# Altium PCB RF315Mhz.PcbDoc (part 4 of 5)
Units mil, origin at the board's own origin, x right, y up, seen from the top; angles counter-clockwise.
Board outline 4094.49 x 3779.53 mil, 2 copper layers (Top Layer, Bottom Layer); 180 components, 20 nets, 660 pads, 48 vias.
Unrouted connection lines stored in the file: 100.
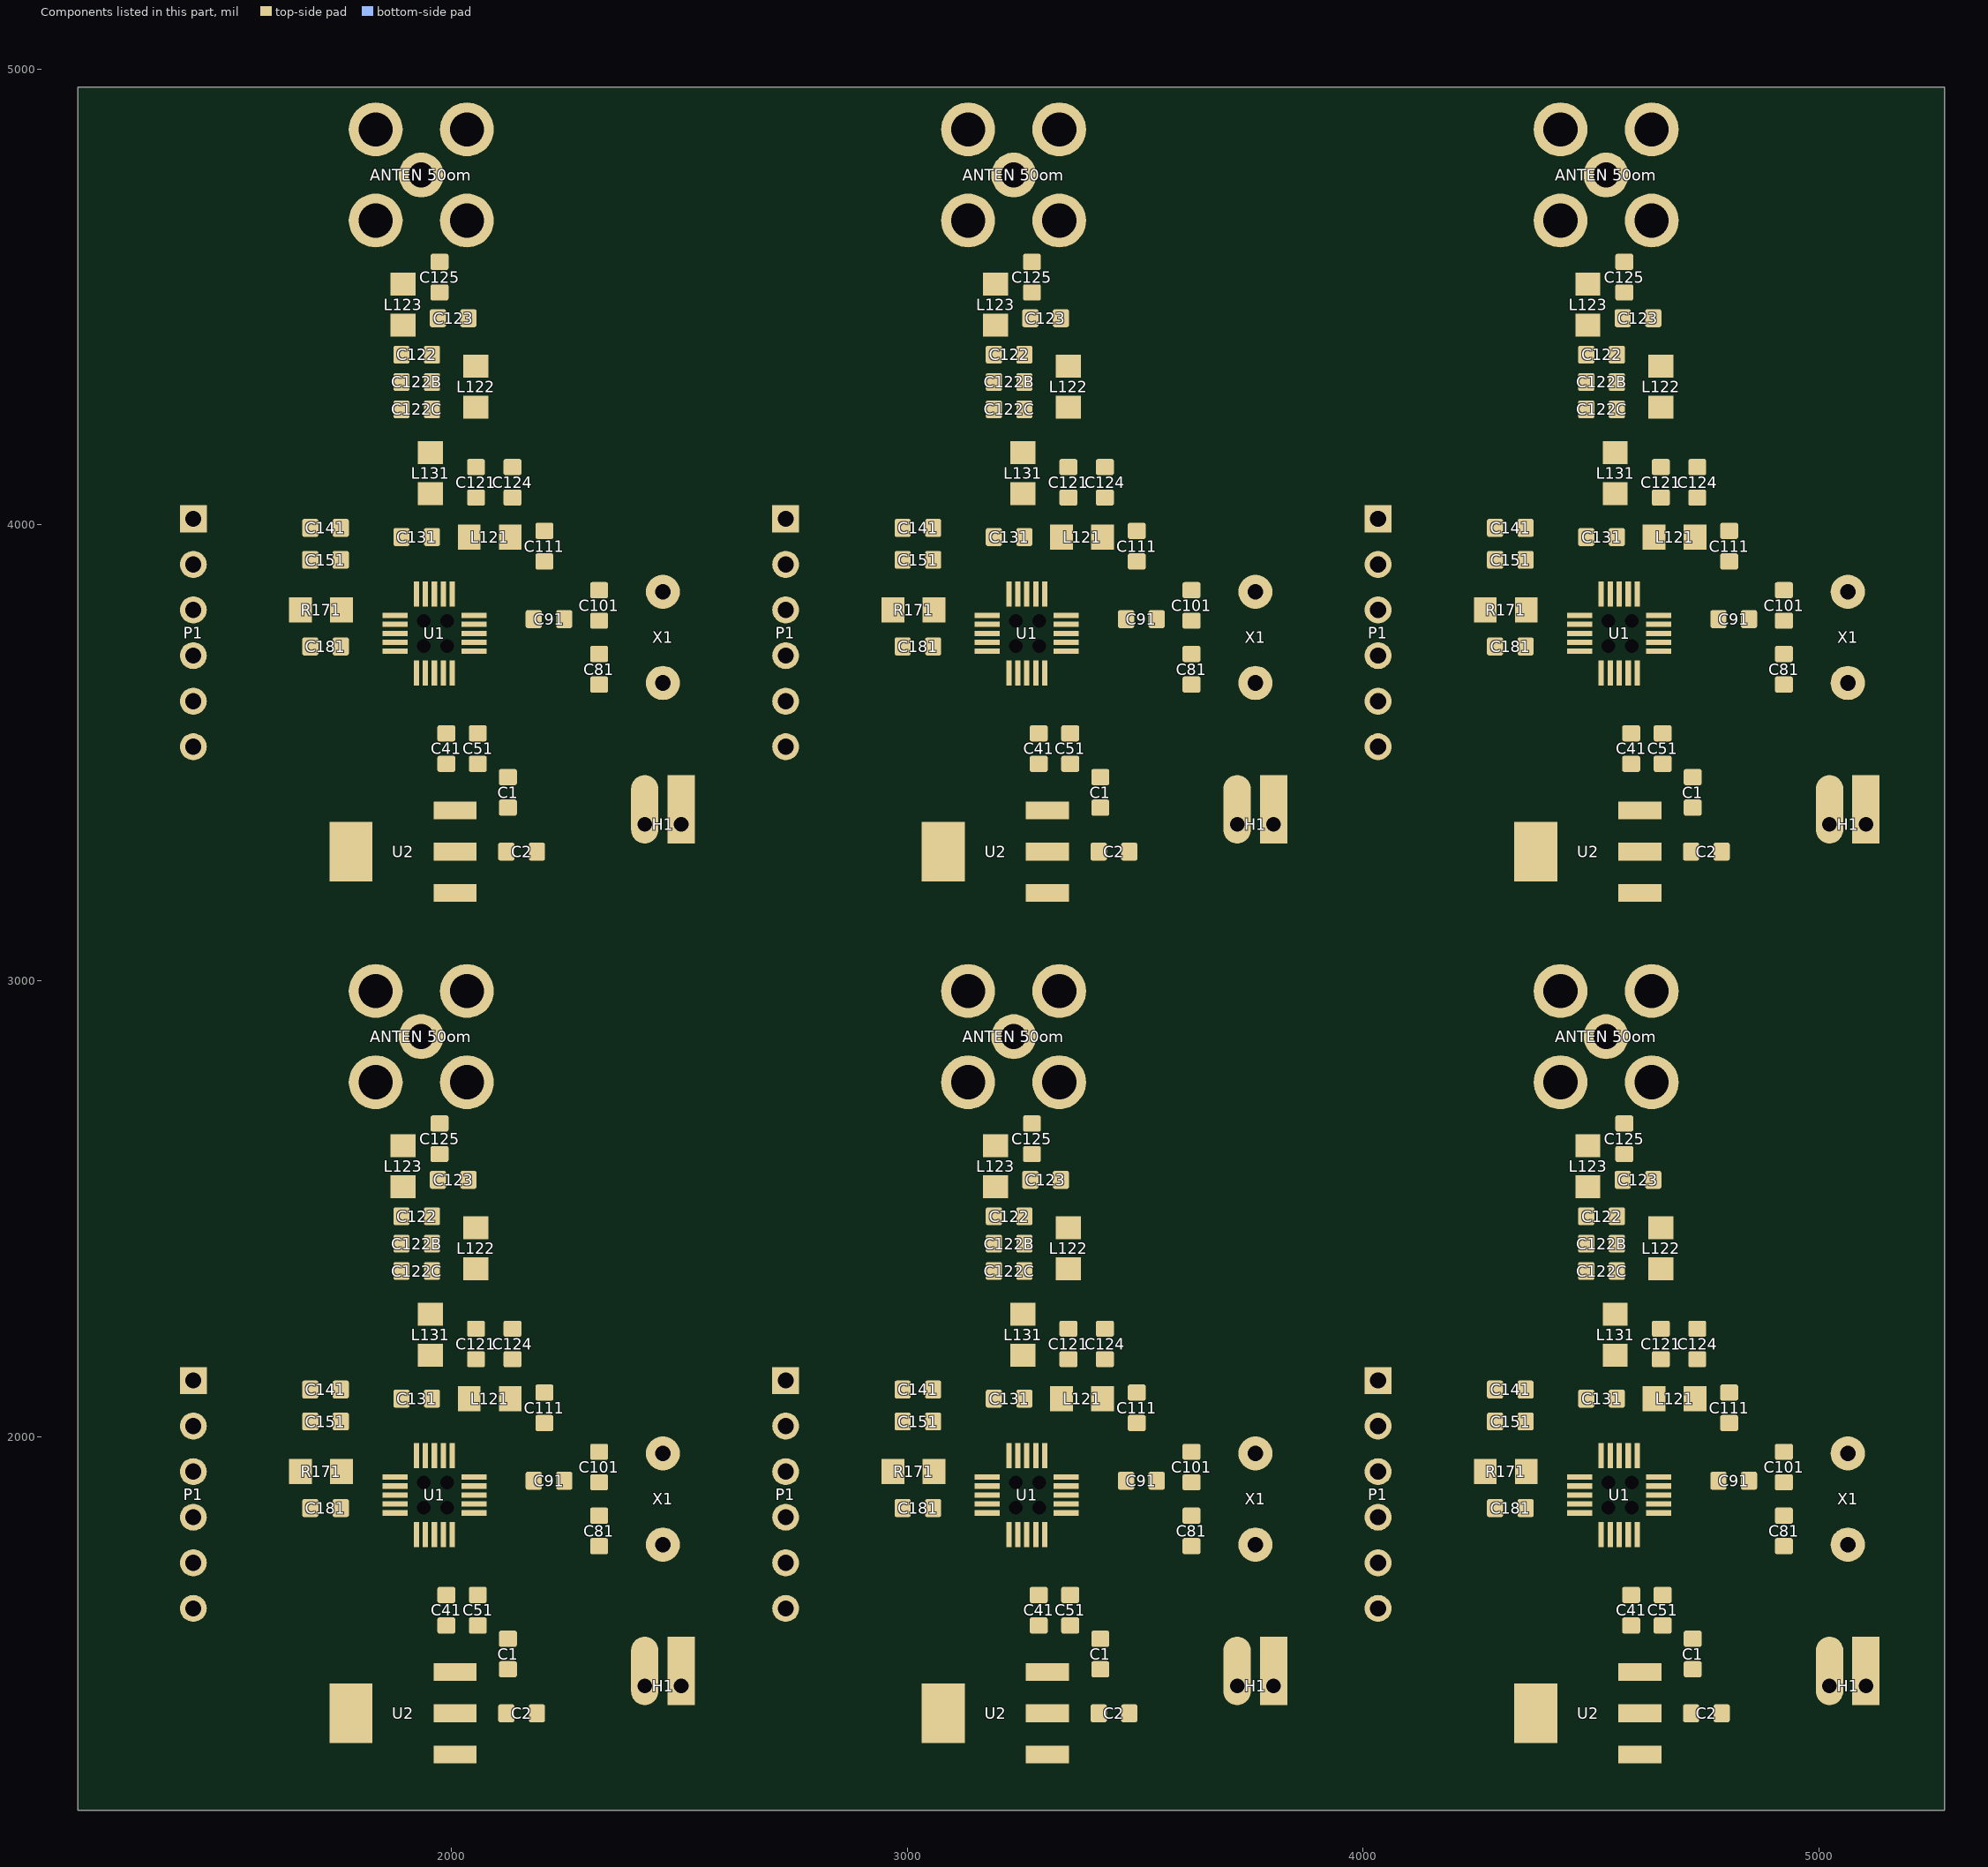
[diagram p4: the components of this part, seen from the top]

## Via types
v1: diameter 50, hole 28, Top Layer to Bottom Layer, 48 vias

## Nets (pads, with @x,y where several pads share a name; then routed paths per layer and width w, separated by ;. In a path a pad name is that pad's centre, name@x,y a point inside that pad or via, vN(x,y) a via of type N, cw(c..) or ccw(c..) an arc to the next point about the centre after c; other vN are vias at no path point) (continued)
copper on no net: (continued)
  Top Layer w1: 3815.78,2886.78 3818.78,2886.78 ; 3815.78,2887.78 3818.78,2887.78 ; 3815.78,2888.78 3818.78,2888.78 ; 3815.78,2889.78 3818.78,2889.78 ; 3815.78,2890.78 3818.78,2890.78 ; 3815.78,2891.78 3818.78,2891.78 ; 3815.78,2892.78 3818.78,2892.78 ; 3815.78,2893.78 3818.78,2893.78 ; 3815.78,2894.78 3818.78,2894.78 ; 3815.78,2895.78 3818.78,2895.78 ; 3815.78,2896.78 3818.78,2896.78 ; 3815.78,2897.78 3818.78,2897.78 ; 3815.78,2898.78 3818.78,2898.78 ; 3815.78,2899.78 3818.78,2899.78 ; 3815.78,2900.78 3818.78,2900.78 ; 3815.78,2901.78 3818.78,2901.78 ; 3815.78,2902.78 3818.78,2902.78 ; 3815.78,2903.78 3818.78,2903.78 ; 3815.78,2904.78 3818.78,2904.78 ; 3815.78,2905.78 3818.78,2905.78 ; 3815.78,2906.78 3818.78,2906.78 ; 3815.78,2907.78 3818.78,2907.78 ; 3815.78,2908.78 3818.78,2908.78 ; 3815.78,2909.78 3818.78,2909.78 ; 3815.78,2910.78 3818.78,2910.78 ; 3815.78,2911.78 3818.78,2911.78 ; 3815.78,2912.78 3818.78,2912.78 ; 3815.78,2913.78 3818.78,2913.78 ; 3815.78,2914.78 3818.78,2914.78 ; 3815.78,2915.78 3818.78,2915.78 ; 3815.78,2916.78 3818.78,2916.78 ; 3815.78,2917.78 3818.78,2917.78 ; 3815.78,2918.78 3818.78,2918.78 ; 3815.78,2919.78 3818.78,2919.78 ; 3815.78,2920.78 3818.78,2920.78 ; 3815.78,2921.78 3818.78,2921.78 ; 3815.78,2922.78 3818.78,2922.78 ; 3815.78,2923.78 3818.78,2923.78 ; 3815.78,2924.78 3818.78,2924.78 ; 3815.78,2925.78 3818.78,2925.78 ; 3815.78,2926.78 3818.78,2926.78 ; 3815.78,2927.78 3818.78,2927.78 ; 3815.78,2928.78 3818.78,2928.78 ; 3815.78,2929.78 3818.78,2929.78 ; 3815.78,2930.78 3818.78,2930.78 ; 3815.78,2931.78 3818.78,2931.78 ; 3815.78,2932.78 3818.78,2932.78 ; 3815.78,2933.78 3818.78,2933.78 ; 3815.78,2934.78 3818.78,2934.78 ; 3815.78,2935.78 3818.78,2935.78 ; 3815.78,2936.78 3818.78,2936.78 ; 3815.78,2937.78 3818.78,2937.78 ; 3815.78,2938.78 3818.78,2938.78 ; 3815.78,2939.78 3818.78,2939.78 ; 3815.78,2940.78 3818.78,2940.78 ; 3815.78,2941.78 3818.78,2941.78 ; 3815.78,2942.78 3818.78,2942.78 ; 3815.78,2943.78 3818.78,2943.78 ; 3815.78,2944.78 3818.78,2944.78 ; 3815.78,2945.78 3818.78,2945.78 ; 3815.78,2946.78 3818.78,2946.78 ; 3815.78,2947.78 3818.78,2947.78 ; 3815.78,2948.78 3818.78,2948.78 ; 3815.78,2949.78 3818.78,2949.78 ; 3815.78,2950.78 3818.78,2950.78 ; 3815.78,2951.78 3818.78,2951.78 ; 3815.78,4698.54 3818.78,4698.54 ; 3815.78,4699.54 3818.78,4699.54 ; 3815.78,4700.54 3818.78,4700.54 ; 3815.78,4701.54 3818.78,4701.54 ; 3815.78,4702.54 3818.78,4702.54 ; 3815.78,4703.54 3818.78,4703.54 ; 3815.78,4704.54 3818.78,4704.54 ; 3815.78,4705.54 3818.78,4705.54 ; 3815.78,4706.54 3818.78,4706.54 ; 3815.78,4707.54 3818.78,4707.54 ; 3815.78,4708.54 3818.78,4708.54 ; 3815.78,4709.54 3818.78,4709.54 ; 3815.78,4710.54 3818.78,4710.54 ; 3815.78,4711.54 3818.78,4711.54 ; 3815.78,4712.54 3818.78,4712.54 ; 3815.78,4713.54 3818.78,4713.54 ; 3815.78,4714.54 3818.78,4714.54 ; 3815.78,4715.54 3818.78,4715.54 ; 3815.78,4716.54 3818.78,4716.54 ; 3815.78,4717.54 3818.78,4717.54 ; 3815.78,4718.54 3818.78,4718.54 ; 3815.78,4719.54 3818.78,4719.54 ; 3815.78,4720.54 3818.78,4720.54 ; 3815.78,4721.54 3818.78,4721.54 ; 3815.78,4722.54 3818.78,4722.54 ; 3815.78,4723.54 3818.78,4723.54 ; 3815.78,4724.54 3818.78,4724.54 ; 3815.78,4725.54 3818.78,4725.54 ; 3815.78,4726.54 3818.78,4726.54 ; 3815.78,4727.54 3818.78,4727.54 ; 3815.78,4728.54 3818.78,4728.54 ; 3815.78,4729.54 3818.78,4729.54 ; 3815.78,4730.54 3818.78,4730.54 ; 3815.78,4731.54 3818.78,4731.54 ; 3815.78,4732.54 3818.78,4732.54 ; 3815.78,4733.54 3818.78,4733.54 ; 3815.78,4734.54 3818.78,4734.54 ; 3815.78,4735.54 3818.78,4735.54 ; 3815.78,4736.54 3818.78,4736.54 ; 3815.78,4737.54 3818.78,4737.54 ; 3815.78,4738.54 3818.78,4738.54 ; 3815.78,4739.54 3818.78,4739.54 ; 3815.78,4740.54 3818.78,4740.54 ; 3815.78,4741.54 3818.78,4741.54 ; 3815.78,4742.54 3818.78,4742.54 ; 3815.78,4743.54 3818.78,4743.54 ; 3815.78,4744.54 3818.78,4744.54 ; 3815.78,4745.54 3818.78,4745.54 ; 3815.78,4746.54 3818.78,4746.54 ; 3815.78,4747.54 3818.78,4747.54 ; 3815.78,4748.54 3818.78,4748.54 ; 3815.78,4749.54 3818.78,4749.54 ; 3815.78,4750.54 3818.78,4750.54 ; 3815.78,4751.54 3818.78,4751.54 ; 3815.78,4752.54 3818.78,4752.54 ; 3815.78,4753.54 3818.78,4753.54 ; 3815.78,4754.54 3818.78,4754.54 ; 3815.78,4755.54 3818.78,4755.54 ; 3815.78,4756.54 3818.78,4756.54 ; 3815.78,4757.54 3818.78,4757.54 ; 3815.78,4758.54 3818.78,4758.54 ; 3815.78,4759.54 3818.78,4759.54 ; 3815.78,4760.54 3818.78,4760.54 ; 3815.78,4761.54 3818.78,4761.54 ; 3815.78,4762.54 3818.78,4762.54 ; 3815.78,4763.54 3818.78,4763.54 ; 3815.78,4764.54 3818.78,4764.54 ; 3815.78,4765.54 3818.78,4765.54 ; 3815.78,4766.54 3818.78,4766.54 ; 3815.78,4767.54 3818.78,4767.54 ; 3815.78,4768.54 3818.78,4768.54 ; 3815.78,4769.54 3818.78,4769.54 ; 3815.78,4770.54 3818.78,4770.54 ; 3815.78,4771.54 3818.78,4771.54 ; 3815.78,4772.54 3818.78,4772.54 ; 3815.78,4773.54 3818.78,4773.54 ; 3815.78,4774.54 3818.78,4774.54 ; 3815.78,4775.54 3818.78,4775.54 ; 3815.78,4776.54 3818.78,4776.54 ; 3815.78,4777.54 3818.78,4777.54 ; 3815.78,4778.54 3818.78,4778.54 ; 3815.78,4779.54 3818.78,4779.54 ; 3815.78,4780.54 3818.78,4780.54 ; 3815.78,4781.54 3818.78,4781.54 ; 3815.78,4782.54 3818.78,4782.54 ; 3815.78,4783.54 3818.78,4783.54 ; 3815.78,4784.54 3818.78,4784.54 ; 3815.78,4785.54 3818.78,4785.54 ; 3815.78,4786.54 3818.78,4786.54 ; 3815.78,4787.54 3818.78,4787.54 ; 3815.78,4788.54 3818.78,4788.54 ; 3815.78,4789.54 3818.78,4789.54 ; 3815.78,4790.54 3818.78,4790.54 ; 3815.78,4791.54 3818.78,4791.54 ; 3815.78,4792.54 3818.78,4792.54 ; 3815.78,4793.54 3818.78,4793.54 ; 3815.78,4794.54 3818.78,4794.54 ; 3815.78,4795.54 3818.78,4795.54 ; 3815.78,4796.54 3818.78,4796.54 ; 3815.78,4797.54 3818.78,4797.54 ; 3815.78,4798.54 3818.78,4798.54 ; 3815.78,4799.54 3818.78,4799.54 ; 3815.78,4800.54 3818.78,4800.54 ; 3815.78,4801.54 3818.78,4801.54 ; 3815.78,4802.54 3818.78,4802.54 ; 3815.78,4803.54 3818.78,4803.54 ; 3815.78,4804.54 3818.78,4804.54 ; 3815.78,4805.54 3818.78,4805.54 ; 3815.78,4806.54 3818.78,4806.54 ; 3815.78,4807.54 3818.78,4807.54 ; 3815.78,4808.54 3818.78,4808.54 ; 3815.78,4809.54 3818.78,4809.54 ; 3815.78,4810.54 3818.78,4810.54 ; 3815.78,4811.54 3818.78,4811.54 ; 3815.78,4812.54 3818.78,4812.54 ; 3815.78,4813.54 3818.78,4813.54 ; 3815.78,4814.54 3818.78,4814.54 ; 3815.78,4815.54 3818.78,4815.54 ; 3815.78,4816.54 3818.78,4816.54 ; 3815.78,4817.54 3818.78,4817.54 ; 3815.78,4818.54 3818.78,4818.54 ; 3815.78,4819.54 3818.78,4819.54 ; 3815.78,4820.54 3818.78,4820.54 ; 3815.78,4821.54 3818.78,4821.54 ; 3815.78,4822.54 3818.78,4822.54 ; 3815.78,4823.54 3818.78,4823.54 ; 3815.78,4824.54 3818.78,4824.54 ; 3815.78,4825.54 3818.78,4825.54 ; 3815.78,4826.54 3818.78,4826.54 ; 3815.78,4827.54 3818.78,4827.54 ; 3815.78,4828.54 3818.78,4828.54 ; 3815.78,4829.54 3818.78,4829.54 ; 3815.78,4830.54 3818.78,4830.54 ; 3815.78,4831.54 3818.78,4831.54 ; 3815.78,4832.54 3818.78,4832.54 ; 3815.78,4833.54 3818.78,4833.54 ; 3815.78,4834.54 3818.78,4834.54 ; 3815.78,4835.54 3818.78,4835.54 ; 3815.78,4836.54 3818.78,4836.54 ; 3815.78,4837.54 3818.78,4837.54 ; 3815.78,4838.54 3818.78,4838.54 ; 3815.78,4839.54 3818.78,4839.54 ; 3815.78,4840.54 3818.78,4840.54 ; 3815.78,4841.54 3818.78,4841.54 ; 4917.99,2807.78 4920.99,2807.78 ; 4917.99,2808.78 4920.99,2808.78 ; 4917.99,2809.78 4920.99,2809.78 ; 4917.99,2810.78 4920.99,2810.78 ; 4917.99,2811.78 4920.99,2811.78 ; 4917.99,2812.78 4920.99,2812.78 ; 4917.99,2813.78 4920.99,2813.78 ; 4917.99,2814.78 4920.99,2814.78 ; 4917.99,2815.78 4920.99,2815.78 ; 4917.99,2816.78 4920.99,2816.78 ; 4917.99,2817.78 4920.99,2817.78 ; 4917.99,2818.78 4920.99,2818.78 ; 4917.99,2819.78 4920.99,2819.78 ; 4917.99,2820.78 4920.99,2820.78 ; 4917.99,2821.78 4920.99,2821.78 ; 4917.99,2822.78 4920.99,2822.78 ; 4917.99,2823.78 4920.99,2823.78 ; 4917.99,2824.78 4920.99,2824.78 ; 4917.99,2825.78 4920.99,2825.78 ; 4917.99,2826.78 4920.99,2826.78 ; 4917.99,2827.78 4920.99,2827.78 ; 4917.99,2828.78 4920.99,2828.78 ; 4917.99,2829.78 4920.99,2829.78 ; 4917.99,2830.78 4920.99,2830.78 ; 4917.99,2831.78 4920.99,2831.78 ; 4917.99,2832.78 4920.99,2832.78 ; 4917.99,2833.78 4920.99,2833.78 ; 4917.99,2834.78 4920.99,2834.78 ; 4917.99,2835.78 4920.99,2835.78 ; 4917.99,2836.78 4920.99,2836.78 ; 4917.99,2837.78 4920.99,2837.78 ; 4917.99,2838.78 4920.99,2838.78 ; 4917.99,2839.78 4920.99,2839.78 ; 4917.99,2840.78 4920.99,2840.78 ; 4917.99,2841.78 4920.99,2841.78 ; 4917.99,2842.78 4920.99,2842.78 ; 4917.99,2843.78 4920.99,2843.78 ; 4917.99,2844.78 4920.99,2844.78 ; 4917.99,2845.78 4920.99,2845.78 ; 4917.99,2846.78 4920.99,2846.78 ; 4917.99,2847.78 4920.99,2847.78 ; 4917.99,2848.78 4920.99,2848.78 ; 4917.99,2849.78 4920.99,2849.78 ; 4917.99,2850.78 4920.99,2850.78 ; 4917.99,2851.78 4920.99,2851.78 ; 4917.99,2852.78 4920.99,2852.78 ; 4917.99,2853.78 4920.99,2853.78 ; 4917.99,2854.78 4920.99,2854.78 ; 4917.99,2855.78 4920.99,2855.78 ; 4917.99,2856.78 4920.99,2856.78 ; 4917.99,2857.78 4920.99,2857.78 ; 4917.99,2858.78 4920.99,2858.78 ; 4917.99,2859.78 4920.99,2859.78 ; 4917.99,2860.78 4920.99,2860.78 ; 4917.99,2861.78 4920.99,2861.78 ; 4917.99,2862.78 4920.99,2862.78 ; 4917.99,2863.78 4920.99,2863.78 ; 4917.99,2864.78 4920.99,2864.78 ; 4917.99,2865.78 4920.99,2865.78 ; 4917.99,2866.78 4920.99,2866.78 ; 4917.99,2867.78 4920.99,2867.78 ; 4917.99,2868.78 4920.99,2868.78 ; 4917.99,2869.78 4920.99,2869.78 ; 4917.99,2870.78 4920.99,2870.78 ; 4917.99,2871.78 4920.99,2871.78 ; 4917.99,2872.78 4920.99,2872.78 ; 4917.99,2873.78 4920.99,2873.78 ; 4917.99,2874.78 4920.99,2874.78 ; 4917.99,2875.78 4920.99,2875.78 ; 4917.99,2876.78 4920.99,2876.78 ; 4917.99,2877.78 4920.99,2877.78 ; 4917.99,2878.78 4920.99,2878.78 ; 4917.99,2879.78 4920.99,2879.78 ; 4917.99,2880.78 4920.99,2880.78 ; 4917.99,2881.78 4920.99,2881.78 ; 4917.99,2882.78 4920.99,2882.78 ; 4917.99,2883.78 4920.99,2883.78 ; 4917.99,2884.78 4920.99,2884.78 ; 4917.99,2885.78 4920.99,2885.78 ; 4917.99,2886.78 4920.99,2886.78 ; 4917.99,2887.78 4920.99,2887.78 ; 4917.99,2888.78 4920.99,2888.78 ; 4917.99,2889.78 4920.99,2889.78 ; 4917.99,2890.78 4920.99,2890.78 ; 4917.99,2891.78 4920.99,2891.78 ; 4917.99,2892.78 4920.99,2892.78 ; 4917.99,2893.78 4920.99,2893.78 ; 4917.99,2894.78 4920.99,2894.78 ; 4917.99,2895.78 4920.99,2895.78 ; 4917.99,2896.78 4920.99,2896.78 ; 4917.99,2897.78 4920.99,2897.78 ; 4917.99,2898.78 4920.99,2898.78 ; 4917.99,2899.78 4920.99,2899.78 ; 4917.99,2900.78 4920.99,2900.78 ; 4917.99,2901.78 4920.99,2901.78 ; 4917.99,2902.78 4920.99,2902.78 ; 4917.99,2903.78 4920.99,2903.78 ; 4917.99,2904.78 4920.99,2904.78 ; 4917.99,2905.78 4920.99,2905.78 ; 4917.99,2906.78 4920.99,2906.78 ; 4917.99,2907.78 4920.99,2907.78 ; 4917.99,2908.78 4920.99,2908.78 ; 4917.99,2909.78 4920.99,2909.78 ; 4917.99,2910.78 4920.99,2910.78 ; 4917.99,2911.78 4920.99,2911.78 ; 4917.99,2912.78 4920.99,2912.78 ; 4917.99,2913.78 4920.99,2913.78 ; 4917.99,2914.78 4920.99,2914.78 ; 4917.99,2915.78 4920.99,2915.78 ; 4917.99,2916.78 4920.99,2916.78 ; 4917.99,2917.78 4920.99,2917.78 ; 4917.99,2918.78 4920.99,2918.78 ; 4917.99,2919.78 4920.99,2919.78 ; 4917.99,2920.78 4920.99,2920.78 ; 4917.99,2921.78 4920.99,2921.78 ; 4917.99,2922.78 4920.99,2922.78 ; 4917.99,2923.78 4920.99,2923.78 ; 4917.99,2924.78 4920.99,2924.78 ; 4917.99,2925.78 4920.99,2925.78 ; 4917.99,2926.78 4920.99,2926.78 ; 4917.99,2927.78 4920.99,2927.78 ; 4917.99,2928.78 4920.99,2928.78 ; 4917.99,2929.78 4920.99,2929.78 ; 4917.99,2930.78 4920.99,2930.78 ; 4917.99,2931.78 4920.99,2931.78 ; 4917.99,2932.78 4920.99,2932.78 ; 4917.99,2933.78 4920.99,2933.78 ; 4917.99,2934.78 4920.99,2934.78 ; 4917.99,2935.78 4920.99,2935.78 ; 4917.99,2936.78 4920.99,2936.78 ; 4917.99,2937.78 4920.99,2937.78 ; 4917.99,2938.78 4920.99,2938.78 ; 4917.99,2939.78 4920.99,2939.78 ; 4917.99,2940.78 4920.99,2940.78 ; 4917.99,2941.78 4920.99,2941.78 ; 4917.99,2942.78 4920.99,2942.78 ; 4917.99,2943.78 4920.99,2943.78 ; 4917.99,2944.78 4920.99,2944.78 ; 4917.99,2945.78 4920.99,2945.78 ; 4917.99,2946.78 4920.99,2946.78 ; 4917.99,2947.78 4920.99,2947.78 ; 4917.99,2948.78 4920.99,2948.78 ; 4917.99,2949.78 4920.99,2949.78 ; 4917.99,2950.78 4920.99,2950.78 ; 4917.99,2951.78 4920.99,2951.78 ; 4917.99,2952.78 4920.99,2952.78 ; 4917.99,2953.78 4921.99,2953.78 ; 4917.99,4697.54 4920.99,4697.54 ; 4917.99,4698.54 4920.99,4698.54 ; 4917.99,4699.54 4920.99,4699.54 ; 4917.99,4700.54 4920.99,4700.54 ; 4917.99,4701.54 4920.99,4701.54 ; 4917.99,4702.54 4920.99,4702.54 ; 4917.99,4703.54 4920.99,4703.54 ; 4917.99,4704.54 4920.99,4704.54 ; 4917.99,4705.54 4920.99,4705.54 ; 4917.99,4706.54 4920.99,4706.54 ; 4917.99,4707.54 4920.99,4707.54 ; 4917.99,4708.54 4920.99,4708.54 ; 4917.99,4709.54 4920.99,4709.54 ; 4917.99,4710.54 4920.99,4710.54 ; 4917.99,4711.54 4920.99,4711.54 ; 4917.99,4712.54 4920.99,4712.54 ; 4917.99,4713.54 4920.99,4713.54 ; 4917.99,4714.54 4920.99,4714.54 ; 4917.99,4715.54 4920.99,4715.54 ; 4917.99,4716.54 4920.99,4716.54 ; 4917.99,4717.54 4920.99,4717.54 ; 4917.99,4718.54 4920.99,4718.54 ; 4917.99,4719.54 4920.99,4719.54 ; 4917.99,4720.54 4920.99,4720.54 ; 4917.99,4721.54 4920.99,4721.54 ; 4917.99,4722.54 4920.99,4722.54 ; 4917.99,4723.54 4920.99,4723.54 ; 4917.99,4724.54 4920.99,4724.54 ; 4917.99,4725.54 4920.99,4725.54 ; 4917.99,4726.54 4920.99,4726.54 ; 4917.99,4727.54 4920.99,4727.54 ; 4917.99,4728.54 4920.99,4728.54 ; 4917.99,4729.54 4920.99,4729.54 ; 4917.99,4730.54 4920.99,4730.54 ; 4917.99,4731.54 4920.99,4731.54 ; 4917.99,4732.54 4920.99,4732.54 ; 4917.99,4733.54 4920.99,4733.54 ; 4917.99,4734.54 4920.99,4734.54 ; 4917.99,4735.54 4920.99,4735.54 ; 4917.99,4736.54 4920.99,4736.54 ; 4917.99,4737.54 4920.99,4737.54 ; 4917.99,4738.54 4920.99,4738.54 ; 4917.99,4739.54 4920.99,4739.54 ; 4917.99,4740.54 4920.99,4740.54 ; 4917.99,4741.54 4920.99,4741.54 ; 4917.99,4742.54 4920.99,4742.54 ; 4917.99,4743.54 4920.99,4743.54 ; 4917.99,4744.54 4920.99,4744.54 ; 4917.99,4745.54 4920.99,4745.54 ; 4917.99,4746.54 4920.99,4746.54 ; 4917.99,4747.54 4920.99,4747.54 ; 4917.99,4748.54 4920.99,4748.54 ; 4917.99,4749.54 4920.99,4749.54 ; 4917.99,4750.54 4920.99,4750.54 ; 4917.99,4751.54 4920.99,4751.54 ; 4917.99,4752.54 4920.99,4752.54 ; 4917.99,4753.54 4920.99,4753.54 ; 4917.99,4754.54 4920.99,4754.54 ; 4917.99,4755.54 4920.99,4755.54 ; 4917.99,4756.54 4920.99,4756.54 ; 4917.99,4757.54 4920.99,4757.54 ; 4917.99,4758.54 4920.99,4758.54 ; 4917.99,4759.54 4920.99,4759.54 ; 4917.99,4760.54 4920.99,4760.54 ; 4917.99,4761.54 4920.99,4761.54 ; 4917.99,4762.54 4920.99,4762.54 ; 4917.99,4763.54 4920.99,4763.54 ; 4917.99,4764.54 4920.99,4764.54 ; 4917.99,4765.54 4920.99,4765.54 ; 4917.99,4766.54 4920.99,4766.54 ; 4917.99,4767.54 4920.99,4767.54 ; 4917.99,4768.54 4920.99,4768.54 ; 4917.99,4769.54 4920.99,4769.54 ; 4917.99,4770.54 4920.99,4770.54 ; 4917.99,4771.54 4920.99,4771.54 ; 4917.99,4772.54 4920.99,4772.54 ; 4917.99,4773.54 4920.99,4773.54 ; 4917.99,4774.54 4920.99,4774.54 ; 4917.99,4775.54 4920.99,4775.54 ; 4917.99,4776.54 4920.99,4776.54 ; 4917.99,4777.54 4920.99,4777.54 ; 4917.99,4778.54 4920.99,4778.54 ; 4917.99,4779.54 4920.99,4779.54 ; 4917.99,4780.54 4920.99,4780.54 ; 4917.99,4781.54 4920.99,4781.54 ; 4917.99,4782.54 4920.99,4782.54 ; 4917.99,4783.54 4920.99,4783.54 ; 4917.99,4784.54 4920.99,4784.54 ; 4917.99,4785.54 4920.99,4785.54 ; 4917.99,4786.54 4920.99,4786.54 ; 4917.99,4787.54 4920.99,4787.54 ; 4917.99,4788.54 4920.99,4788.54 ; 4917.99,4789.54 4920.99,4789.54 ; 4917.99,4790.54 4920.99,4790.54 ; 4917.99,4791.54 4920.99,4791.54 ; 4917.99,4792.54 4920.99,4792.54 ; 4917.99,4793.54 4920.99,4793.54 ; 4917.99,4794.54 4920.99,4794.54 ; 4917.99,4795.54 4920.99,4795.54 ; 4917.99,4796.54 4920.99,4796.54 ; 4917.99,4797.54 4920.99,4797.54 ; 4917.99,4798.54 4920.99,4798.54 ; 4917.99,4799.54 4920.99,4799.54 ; 4917.99,4800.54 4920.99,4800.54 ; 4917.99,4801.54 4920.99,4801.54 ; 4917.99,4802.54 4920.99,4802.54 ; 4917.99,4803.54 4920.99,4803.54 ; 4917.99,4804.54 4920.99,4804.54 ; 4917.99,4805.54 4920.99,4805.54 ; 4917.99,4806.54 4920.99,4806.54 ; 4917.99,4807.54 4920.99,4807.54 ; 4917.99,4808.54 4920.99,4808.54 ; 4917.99,4809.54 4920.99,4809.54 ; 4917.99,4810.54 4920.99,4810.54 ; 4917.99,4811.54 4920.99,4811.54 ; 4917.99,4812.54 4920.99,4812.54 ; 4917.99,4813.54 4920.99,4813.54 ; 4917.99,4814.54 4920.99,4814.54 ; 4917.99,4815.54 4920.99,4815.54 ; 4917.99,4816.54 4920.99,4816.54 ; 4917.99,4817.54 4920.99,4817.54 ; 4917.99,4818.54 4920.99,4818.54 ; 4917.99,4819.54 4920.99,4819.54 ; 4917.99,4820.54 4920.99,4820.54 ; 4917.99,4821.54 4920.99,4821.54 ; 4917.99,4822.54 4920.99,4822.54 ; 4917.99,4823.54 4920.99,4823.54 ; 4917.99,4824.54 4920.99,4824.54 ; 4917.99,4825.54 4920.99,4825.54 ; 4917.99,4826.54 4920.99,4826.54 ; 4917.99,4827.54 4920.99,4827.54 ; 4917.99,4828.54 4920.99,4828.54 ; 4917.99,4829.54 4920.99,4829.54 ; 4917.99,4830.54 4920.99,4830.54 ; 4917.99,4831.54 4920.99,4831.54 ; 4917.99,4832.54 4920.99,4832.54 ; 4917.99,4833.54 4920.99,4833.54 ; 4917.99,4834.54 4920.99,4834.54 ; 4917.99,4835.54 4920.99,4835.54 ; 4917.99,4836.54 4920.99,4836.54 ; 4917.99,4837.54 4920.99,4837.54 ; 4917.99,4838.54 4920.99,4838.54 ; 4917.99,4839.54 4920.99,4839.54 ; 4917.99,4840.54 4920.99,4840.54 ; 4917.99,4841.54 4920.99,4841.54 ; 4917.99,4842.54 4920.99,4842.54 ; 4917.99,4843.54 4921.99,4843.54 ; 4918.99,2803.78 4922.99,2803.78 ; 4918.99,2804.78 4921.99,2804.78 ; 4918.99,2805.78 4921.99,2805.78 ; 4918.99,2806.78 4921.99,2806.78 ; 4918.99,2954.78 4921.99,2954.78 ; 4918.99,2955.78 4921.99,2955.78 ; 4918.99,2956.78 4922.99,2956.78 ; 4918.99,4693.54 4922.99,4693.54 ; 4918.99,4694.54 4921.99,4694.54 ; 4918.99,4695.54 4921.99,4695.54 ; 4918.99,4696.54 4921.99,4696.54 ; 4918.99,4844.54 4921.99,4844.54 ; 4918.99,4845.54 4921.99,4845.54 ; 4918.99,4846.54 4922.99,4846.54 ; 4919.99,2801.78 4922.99,2801.78 ; 4919.99,2802.78 4922.99,2802.78 ; 4919.99,2957.78 4922.99,2957.78 ; 4919.99,2958.78 4922.99,2958.78 ; 4919.99,2959.78 4923.99,2959.78 ; 4919.99,4691.54 4922.99,4691.54 ; 4919.99,4692.54 4922.99,4692.54 ; 4919.99,4847.54 4922.99,4847.54 ; 4919.99,4848.54 4922.99,4848.54 ; 4919.99,4849.54 4923.99,4849.54 ; 4920.99,2799.78 4923.99,2799.78 ; 4920.99,2800.78 4923.99,2800.78 ; 4920.99,2960.78 4923.99,2960.78 ; 4920.99,2961.78 4924.99,2961.78 ; 4920.99,4689.54 4923.99,4689.54 ; 4920.99,4690.54 4923.99,4690.54 ; 4920.99,4850.54 4923.99,4850.54 ; 4920.99,4851.54 4924.99,4851.54 ; 4921.99,2797.78 4925.99,2797.78 ; 4921.99,2798.78 4924.99,2798.78 ; 4921.99,2962.78 4924.99,2962.78 ; 4921.99,2963.78 4925.99,2963.78 ; 4921.99,4687.54 4925.99,4687.54 ; 4921.99,4688.54 4924.99,4688.54 ; 4921.99,4852.54 4924.99,4852.54 ; 4921.99,4853.54 4925.99,4853.54 ; 4922.99,2795.78 4926.99,2795.78 ; 4922.99,2796.78 4925.99,2796.78 ; 4922.99,2964.78 4926.99,2964.78 ; 4922.99,4685.54 4926.99,4685.54 ; 4922.99,4686.54 4925.99,4686.54 ; 4922.99,4854.54 4926.99,4854.54 ; 4923.99,2794.78 4927.99,2794.78 ; 4923.99,2965.78 4927.99,2965.78 ; 4923.99,2966.78 4927.99,2966.78 ; 4923.99,4684.54 4927.99,4684.54 ; 4923.99,4855.54 4927.99,4855.54 ; 4923.99,4856.54 4927.99,4856.54 ; 4924.99,2792.78 4928.99,2792.78 ; 4924.99,2793.78 4928.99,2793.78 ; 4924.99,2967.78 4928.99,2967.78 ; 4924.99,4682.54 4928.99,4682.54 ; 4924.99,4683.54 4928.99,4683.54 ; 4924.99,4857.54 4928.99,4857.54 ; 4925.99,2791.78 4929.99,2791.78 ; 4925.99,2968.78 4929.99,2968.78 ; 4925.99,4681.54 4929.99,4681.54 ; 4925.99,4858.54 4929.99,4858.54 ; 4926.99,2790.78 4931.99,2790.78 ; 4926.99,2969.78 4930.99,2969.78 ; 4926.99,4680.54 4931.99,4680.54 ; 4926.99,4859.54 4930.99,4859.54 ; 4927.99,2789.78 4932.99,2789.78 ; 4927.99,2970.78 4932.99,2970.78 ; 4927.99,4679.54 4932.99,4679.54 ; 4927.99,4860.54 4932.99,4860.54 ; 4928.99,2788.78 4933.99,2788.78 ; 4928.99,2971.78 4933.99,2971.78 ; 4928.99,4678.54 4933.99,4678.54 ; 4928.99,4861.54 4933.99,4861.54 ; 4929.99,2972.78 4934.99,2972.78 ; 4929.99,4862.54 4934.99,4862.54 ; 4930.99,2787.78 4935.99,2787.78 ; 4930.99,2973.78 4936.99,2973.78 ; 4930.99,4677.54 4935.99,4677.54 ; 4930.99,4863.54 4936.99,4863.54 ; 4931.99,2786.78 4936.99,2786.78 ; 4931.99,4676.54 4936.99,4676.54 ; 4932.99,2785.78 4939.99,2785.78 ; 4932.99,2974.78 4938.99,2974.78 ; 4932.99,4675.54 4939.99,4675.54 ; 4932.99,4864.54 4938.99,4864.54 ; 4933.99,2975.78 4941.99,2975.78 ; 4933.99,4865.54 4941.99,4865.54 ; 4934.99,2784.78 4941.99,2784.78 ; 4934.99,2950.78 4956.99,2950.78 ; 4934.99,2951.78 4955.99,2951.78 ; 4934.99,2952.78 4954.99,2952.78 ; 4934.99,2953.78 4954.99,2953.78 ; 4934.99,2954.78 4954.99,2954.78 ; 4934.99,2955.78 4954.99,2955.78 ; 4934.99,2956.78 4953.99,2956.78 ; 4934.99,4674.54 4941.99,4674.54 ; 4934.99,4840.54 4956.99,4840.54 ; 4934.99,4841.54 4955.99,4841.54 ; 4934.99,4842.54 4954.99,4842.54 ; 4934.99,4843.54 4954.99,4843.54 ; 4934.99,4844.54 4954.99,4844.54 ; 4934.99,4845.54 4954.99,4845.54 ; 4934.99,4846.54 4953.99,4846.54 ; 4935.99,2948.78 4958.99,2948.78 ; 4935.99,2949.78 4957.99,2949.78 ; 4935.99,2957.78 4953.99,2957.78 ; 4935.99,2958.78 4952.99,2958.78 ; 4935.99,2976.78 4944.99,2976.78 ; 4935.99,4838.54 4958.99,4838.54 ; 4935.99,4839.54 4957.99,4839.54 ; 4935.99,4847.54 4953.99,4847.54 ; 4935.99,4848.54 4952.99,4848.54 ; 4935.99,4866.54 4944.99,4866.54 ; 4936.99,2783.78 4945.99,2783.78 ; 4936.99,2946.78 4960.99,2946.78 ; 4936.99,2947.78 4959.99,2947.78 ; 4936.99,2959.78 4952.99,2959.78 ; 4936.99,4673.54 4945.99,4673.54 ; 4936.99,4836.54 4960.99,4836.54 ; 4936.99,4837.54 4959.99,4837.54 ; 4936.99,4849.54 4952.99,4849.54 ; 4937.99,2800.78 4940.99,2800.78 ; 4937.99,2801.78 4946.99,2801.78 ; 4937.99,2802.78 4952.99,2802.78 ; 4937.99,2803.78 4958.99,2803.78 ; 4937.99,2804.78 4959.99,2804.78 ; 4937.99,2945.78 4961.99,2945.78 ; 4937.99,2960.78 4951.99,2960.78 ; 4937.99,2977.78 5096.99,2977.78 ; 4937.99,4690.54 4940.99,4690.54 ; 4937.99,4691.54 4946.99,4691.54 ; 4937.99,4692.54 4952.99,4692.54 ; 4937.99,4693.54 4958.99,4693.54 ; 4937.99,4694.54 4959.99,4694.54 ; 4937.99,4835.54 4961.99,4835.54 ; 4937.99,4850.54 4951.99,4850.54 ; 4937.99,4867.54 5096.99,4867.54 ; 4938.99,2782.78 5096.99,2782.78 ; 4938.99,2805.78 4960.99,2805.78 ; 4938.99,2806.78 4961.99,2806.78 ; 4938.99,2807.78 4962.99,2807.78 ; 4938.99,2808.78 4963.99,2808.78 ; 4938.99,2809.78 4964.99,2809.78 ; 4938.99,2810.78 4965.99,2810.78 ; 4938.99,2961.78 4949.99,2961.78 ; 4938.99,4672.54 5096.99,4672.54 ; 4938.99,4695.54 4960.99,4695.54 ; 4938.99,4696.54 4961.99,4696.54 ; 4938.99,4697.54 4962.99,4697.54 ; 4938.99,4698.54 4963.99,4698.54 ; 4938.99,4699.54 4964.99,4699.54 ; 4938.99,4700.54 4965.99,4700.54 ; 4938.99,4851.54 4949.99,4851.54 ; 4939.99,2811.78 4966.99,2811.78 ; 4939.99,2812.78 4967.99,2812.78 ; 4939.99,2813.78 4968.99,2813.78 ; 4939.99,2814.78 4969.99,2814.78 ; 4939.99,2815.78 4970.99,2815.78 ; 4939.99,2816.78 4971.99,2816.78 ; 4939.99,2944.78 4962.99,2944.78 ; 4939.99,4701.54 4966.99,4701.54 ; 4939.99,4702.54 4967.99,4702.54 ; 4939.99,4703.54 4968.99,4703.54 ; 4939.99,4704.54 4969.99,4704.54 ; 4939.99,4705.54 4970.99,4705.54 ; 4939.99,4706.54 4971.99,4706.54 ; 4939.99,4834.54 4962.99,4834.54 ; 4940.99,2817.78 4972.99,2817.78 ; 4940.99,2818.78 4973.99,2818.78 ; 4940.99,2819.78 4974.99,2819.78 ; 4940.99,2820.78 4975.99,2820.78 ; 4940.99,2962.78 4947.99,2962.78 ; 4940.99,2978.78 5094.99,2978.78 ; 4940.99,4707.54 4972.99,4707.54 ; 4940.99,4708.54 4973.99,4708.54 ; 4940.99,4709.54 4974.99,4709.54 ; 4940.99,4710.54 4975.99,4710.54 ; 4940.99,4852.54 4947.99,4852.54 ; 4940.99,4868.54 5094.99,4868.54 ; 4941.99,2781.78 5093.99,2781.78 ; 4941.99,2821.78 4976.99,2821.78 ; 4941.99,2943.78 4963.99,2943.78 ; 4941.99,4671.54 5093.99,4671.54 ; 4941.99,4711.54 4976.99,4711.54 ; 4941.99,4833.54 4963.99,4833.54 ; 4942.99,2822.78 4977.99,2822.78 ; 4942.99,4712.54 4977.99,4712.54 ; 4943.99,2823.78 4978.99,2823.78 ; 4943.99,2979.78 5090.99,2979.78 ; 4943.99,4713.54 4978.99,4713.54 ; 4943.99,4869.54 5090.99,4869.54 ; 4944.99,2780.78 5089.99,2780.78 ; 4944.99,2824.78 4979.99,2824.78 ; 4944.99,2894.78 4946.99,2894.78 ; 4944.99,4670.54 5089.99,4670.54 ; 4944.99,4714.54 4979.99,4714.54 ; 4944.99,4784.54 4946.99,4784.54 ; 4945.99,2825.78 4980.99,2825.78 ; 4945.99,2895.78 4949.99,2895.78 ; 4945.99,2942.78 4964.99,2942.78 ; 4945.99,4715.54 4980.99,4715.54 ; 4945.99,4785.54 4949.99,4785.54 ; 4945.99,4832.54 4964.99,4832.54 ; 4946.99,2826.78 4981.99,2826.78 ; 4946.99,2896.78 4952.99,2896.78 ; 4946.99,2941.78 4965.99,2941.78 ; 4946.99,4716.54 4981.99,4716.54 ; 4946.99,4786.54 4952.99,4786.54 ; 4946.99,4831.54 4965.99,4831.54 ; 4947.99,2827.78 4982.99,2827.78 ; 4947.99,2897.78 4955.99,2897.78 ; 4947.99,2940.78 4966.99,2940.78 ; 4947.99,4717.54 4982.99,4717.54 ; 4947.99,4787.54 4955.99,4787.54 ; 4947.99,4830.54 4966.99,4830.54 ; 4948.99,2828.78 4983.99,2828.78 ; 4948.99,2898.78 4958.99,2898.78 ; 4948.99,2939.78 4967.99,2939.78 ; 4948.99,4718.54 4983.99,4718.54 ; 4948.99,4788.54 4958.99,4788.54 ; 4948.99,4829.54 4967.99,4829.54 ; 4949.99,2829.78 4984.99,2829.78 ; 4949.99,2899.78 4960.99,2899.78 ; 4949.99,2938.78 4968.99,2938.78 ; 4949.99,4719.54 4984.99,4719.54 ; 4949.99,4789.54 4960.99,4789.54 ; 4949.99,4828.54 4968.99,4828.54 ; 4950.99,2830.78 4985.99,2830.78 ; 4950.99,2900.78 4963.99,2900.78 ; 4950.99,2937.78 4969.99,2937.78 ; 4950.99,4720.54 4985.99,4720.54 ; 4950.99,4790.54 4963.99,4790.54 ; 4950.99,4827.54 4969.99,4827.54 ; 4951.99,2831.78 4986.99,2831.78 ; 4951.99,2901.78 4966.99,2901.78 ; 4951.99,2936.78 4970.99,2936.78 ; 4951.99,4721.54 4986.99,4721.54 ; 4951.99,4791.54 4966.99,4791.54 ; 4951.99,4826.54 4970.99,4826.54 ; 4952.99,2832.78 4987.99,2832.78 ; 4952.99,2902.78 4967.99,2902.78 ; 4952.99,2935.78 4971.99,2935.78 ; 4952.99,4722.54 4987.99,4722.54 ; 4952.99,4792.54 4967.99,4792.54 ; 4952.99,4825.54 4971.99,4825.54 ; 4953.99,2833.78 4988.99,2833.78 ; 4953.99,2903.78 4968.99,2903.78 ; 4953.99,2934.78 4972.99,2934.78 ; 4953.99,4723.54 4988.99,4723.54 ; 4953.99,4793.54 4968.99,4793.54 ; 4953.99,4824.54 4972.99,4824.54 ; 4954.99,2834.78 4989.99,2834.78 ; 4954.99,2904.78 4969.99,2904.78 ; 4954.99,2933.78 4973.99,2933.78 ; 4954.99,4724.54 4989.99,4724.54 ; 4954.99,4794.54 4969.99,4794.54 ; 4954.99,4823.54 4973.99,4823.54 ; 4955.99,2835.78 4990.99,2835.78 ; 4955.99,2905.78 4970.99,2905.78 ; 4955.99,2932.78 4974.99,2932.78 ; 4955.99,4725.54 4990.99,4725.54 ; 4955.99,4795.54 4970.99,4795.54 ; 4955.99,4822.54 4974.99,4822.54 ; 4956.99,2836.78 4991.99,2836.78 ; 4956.99,2906.78 4971.99,2906.78 ; 4956.99,2931.78 4975.99,2931.78 ; 4956.99,4726.54 4991.99,4726.54 ; 4956.99,4796.54 4971.99,4796.54 ; 4956.99,4821.54 4975.99,4821.54 ; 4957.99,2837.78 4992.99,2837.78 ; 4957.99,2907.78 5007.99,2907.78 ; 4957.99,2930.78 4976.99,2930.78 ; 4957.99,4727.54 4992.99,4727.54 ; 4957.99,4797.54 5007.99,4797.54 ; 4957.99,4820.54 4976.99,4820.54 ; 4958.99,2838.78 4993.99,2838.78 ; 4958.99,2908.78 5006.99,2908.78 ; 4958.99,2929.78 4977.99,2929.78 ; 4958.99,4728.54 4993.99,4728.54 ; 4958.99,4798.54 5006.99,4798.54 ; 4958.99,4819.54 4977.99,4819.54 ; 4959.99,2839.78 4994.99,2839.78 ; 4959.99,2909.78 5005.99,2909.78 ; 4959.99,2928.78 4993.99,2928.78 ; 4959.99,4729.54 4994.99,4729.54 ; 4959.99,4799.54 5005.99,4799.54 ; 4959.99,4818.54 4993.99,4818.54 ; 4960.99,2840.78 4995.99,2840.78 ; 4960.99,2910.78 5004.99,2910.78 ; 4960.99,2927.78 4992.99,2927.78 ; 4960.99,4730.54 4995.99,4730.54 ; 4960.99,4800.54 5004.99,4800.54 ; 4960.99,4817.54 4992.99,4817.54 ; 4961.99,2841.78 4996.99,2841.78 ; 4961.99,2911.78 5003.99,2911.78 ; 4961.99,2926.78 4991.99,2926.78 ; 4961.99,4731.54 4996.99,4731.54 ; 4961.99,4801.54 5003.99,4801.54 ; 4961.99,4816.54 4991.99,4816.54 ; 4962.99,2842.78 4997.99,2842.78 ; 4962.99,2912.78 5002.99,2912.78 ; 4962.99,2925.78 4990.99,2925.78 ; 4962.99,4732.54 4997.99,4732.54 ; 4962.99,4802.54 5002.99,4802.54 ; 4962.99,4815.54 4990.99,4815.54 ; 4963.99,2843.78 4998.99,2843.78 ; 4963.99,2913.78 5001.99,2913.78 ; 4963.99,2924.78 4990.99,2924.78 ; 4963.99,4733.54 4998.99,4733.54 ; 4963.99,4803.54 5001.99,4803.54 ; 4963.99,4814.54 4990.99,4814.54 ; 4964.99,2844.78 4999.99,2844.78 ; 4964.99,2914.78 5000.99,2914.78 ; 4964.99,2923.78 4991.99,2923.78 ; 4964.99,4734.54 4999.99,4734.54 ; 4964.99,4804.54 5000.99,4804.54 ; 4964.99,4813.54 4991.99,4813.54 ; 4965.99,2845.78 5000.99,2845.78 ; 4965.99,2915.78 4999.99,2915.78 ; 4965.99,2922.78 4992.99,2922.78 ; 4965.99,4735.54 5000.99,4735.54 ; 4965.99,4805.54 4999.99,4805.54 ; 4965.99,4812.54 4992.99,4812.54 ; 4966.99,2846.78 5001.99,2846.78 ; 4966.99,2916.78 4998.99,2916.78 ; 4966.99,2921.78 4993.99,2921.78 ; 4966.99,4736.54 5001.99,4736.54 ; 4966.99,4806.54 4998.99,4806.54 ; 4966.99,4811.54 4993.99,4811.54 ; 4967.99,2847.78 5002.99,2847.78 ; 4967.99,2917.78 4997.99,2917.78 ; 4967.99,2920.78 4994.99,2920.78 ; 4967.99,4737.54 5002.99,4737.54 ; 4967.99,4807.54 4997.99,4807.54 ; 4967.99,4810.54 4994.99,4810.54 ; 4968.99,2848.78 5003.99,2848.78 ; 4968.99,2918.78 4996.99,2918.78 ; 4968.99,2919.78 4995.99,2919.78 ; 4968.99,4738.54 5003.99,4738.54 ; 4968.99,4808.54 4996.99,4808.54 ; 4968.99,4809.54 4995.99,4809.54 ; 4969.99,2849.78 5004.99,2849.78 ; 4969.99,4739.54 5004.99,4739.54 ; 4970.99,2850.78 5005.99,2850.78 ; 4970.99,4740.54 5005.99,4740.54 ; 4971.99,2851.78 5006.99,2851.78 ; 4971.99,4741.54 5006.99,4741.54 ; 4972.99,2852.78 5007.99,2852.78 ; 4972.99,4742.54 5007.99,4742.54 ; 4973.99,2853.78 5008.99,2853.78 ; 4973.99,2906.78 5008.99,2906.78 ; 4973.99,4743.54 5008.99,4743.54 ; 4973.99,4796.54 5008.99,4796.54 ; 4974.99,2854.78 5009.99,2854.78 ; 4974.99,2905.78 5009.99,2905.78 ; 4974.99,4744.54 5009.99,4744.54 ; 4974.99,4795.54 5009.99,4795.54 ; 4975.99,2855.78 5010.99,2855.78 ; 4975.99,2904.78 5010.99,2904.78 ; 4975.99,4745.54 5010.99,4745.54 ; 4975.99,4794.54 5010.99,4794.54 ; 4976.99,2856.78 5011.99,2856.78 ; 4976.99,2903.78 5011.99,2903.78 ; 4976.99,4746.54 5011.99,4746.54 ; 4976.99,4793.54 5011.99,4793.54 ; 4977.99,2857.78 5012.99,2857.78 ; 4977.99,2902.78 5012.99,2902.78 ; 4977.99,4747.54 5012.99,4747.54 ; 4977.99,4792.54 5012.99,4792.54 ; 4978.99,2858.78 5013.99,2858.78 ; 4978.99,2901.78 5013.99,2901.78 ; 4978.99,4748.54 5013.99,4748.54 ; 4978.99,4791.54 5013.99,4791.54 ; 4979.99,2859.78 5014.99,2859.78 ; 4979.99,2900.78 5014.99,2900.78 ; 4979.99,2929.78 4994.99,2929.78 ; 4979.99,4749.54 5014.99,4749.54 ; 4979.99,4790.54 5014.99,4790.54 ; 4979.99,4819.54 4994.99,4819.54 ; 4980.99,2860.78 5015.99,2860.78 ; 4980.99,2899.78 5015.99,2899.78 ; 4980.99,2930.78 4995.99,2930.78 ; 4980.99,4750.54 5015.99,4750.54 ; 4980.99,4789.54 5015.99,4789.54 ; 4980.99,4820.54 4995.99,4820.54 ; 4981.99,2861.78 5016.99,2861.78 ; 4981.99,2898.78 5016.99,2898.78 ; 4981.99,2931.78 4996.99,2931.78 ; 4981.99,4751.54 5016.99,4751.54 ; 4981.99,4788.54 5016.99,4788.54 ; 4981.99,4821.54 4996.99,4821.54 ; 4982.99,2862.78 5052.99,2862.78 ; 4982.99,2897.78 5052.99,2897.78 ; 4982.99,2932.78 4996.99,2932.78 ; 4982.99,4752.54 5052.99,4752.54 ; 4982.99,4787.54 5052.99,4787.54 ; 4982.99,4822.54 4996.99,4822.54 ; 4983.99,2863.78 5051.99,2863.78 ; 4983.99,2896.78 5051.99,2896.78 ; 4983.99,2933.78 4996.99,2933.78 ; 4983.99,4753.54 5051.99,4753.54 ; 4983.99,4786.54 5051.99,4786.54 ; 4983.99,4823.54 4996.99,4823.54 ; 4984.99,2864.78 5050.99,2864.78 ; 4984.99,2895.78 5050.99,2895.78 ; 4984.99,2934.78 4997.99,2934.78 ; 4984.99,4754.54 5050.99,4754.54 ; 4984.99,4785.54 5050.99,4785.54 ; 4984.99,4824.54 4997.99,4824.54 ; 4985.99,2865.78 5049.99,2865.78 ; 4985.99,2894.78 5049.99,2894.78 ; 4985.99,2935.78 4997.99,2935.78 ; 4985.99,4755.54 5049.99,4755.54 ; 4985.99,4784.54 5049.99,4784.54 ; 4985.99,4825.54 4997.99,4825.54 ; 4986.99,2866.78 5048.99,2866.78 ; 4986.99,2893.78 5048.99,2893.78 ; 4986.99,2936.78 4997.99,2936.78 ; 4986.99,4756.54 5048.99,4756.54 ; 4986.99,4783.54 5048.99,4783.54 ; 4986.99,4826.54 4997.99,4826.54 ; 4987.99,2867.78 5047.99,2867.78 ; 4987.99,2892.78 5047.99,2892.78 ; 4987.99,2937.78 4998.99,2937.78 ; 4987.99,4757.54 5047.99,4757.54 ; 4987.99,4782.54 5047.99,4782.54 ; 4987.99,4827.54 4998.99,4827.54 ; 4988.99,2868.78 5046.99,2868.78 ; 4988.99,2891.78 5046.99,2891.78 ; 4988.99,2938.78 4998.99,2938.78 ; 4988.99,4758.54 5046.99,4758.54 ; 4988.99,4781.54 5046.99,4781.54 ; 4988.99,4828.54 4998.99,4828.54 ; 4989.99,2869.78 5045.99,2869.78 ; 4989.99,2890.78 5045.99,2890.78 ; 4989.99,2939.78 4999.99,2939.78 ; 4989.99,4759.54 5045.99,4759.54 ; 4989.99,4780.54 5045.99,4780.54 ; 4989.99,4829.54 4999.99,4829.54 ; 4990.99,2870.78 5044.99,2870.78 ; 4990.99,2889.78 5044.99,2889.78 ; 4990.99,2940.78 4999.99,2940.78 ; 4990.99,4760.54 5044.99,4760.54 ; 4990.99,4779.54 5044.99,4779.54 ; 4990.99,4830.54 4999.99,4830.54 ; 4991.99,2871.78 5043.99,2871.78 ; 4991.99,2888.78 5043.99,2888.78 ; 4991.99,2941.78 4999.99,2941.78 ; 4991.99,4761.54 5043.99,4761.54 ; 4991.99,4778.54 5043.99,4778.54 ; 4991.99,4831.54 4999.99,4831.54 ; 4992.99,2872.78 5042.99,2872.78 ; 4992.99,2887.78 5042.99,2887.78 ; 4992.99,2942.78 5000.99,2942.78 ; 4992.99,4762.54 5042.99,4762.54 ; 4992.99,4777.54 5042.99,4777.54 ; 4992.99,4832.54 5000.99,4832.54 ; 4993.99,2873.78 5041.99,2873.78 ; 4993.99,2886.78 5041.99,2886.78 ; 4993.99,2943.78 5000.99,2943.78 ; 4993.99,4763.54 5041.99,4763.54 ; 4993.99,4776.54 5041.99,4776.54 ; 4993.99,4833.54 5000.99,4833.54 ; 4994.99,2874.78 5040.99,2874.78 ; 4994.99,2885.78 5040.99,2885.78 ; 4994.99,2944.78 5000.99,2944.78 ; 4994.99,4764.54 5040.99,4764.54 ; 4994.99,4775.54 5040.99,4775.54 ; 4994.99,4834.54 5000.99,4834.54 ; 4995.99,2875.78 5039.99,2875.78 ; 4995.99,2884.78 5039.99,2884.78 ; 4995.99,2945.78 5001.99,2945.78 ; 4995.99,4765.54 5039.99,4765.54 ; 4995.99,4774.54 5039.99,4774.54 ; 4995.99,4835.54 5001.99,4835.54 ; 4996.99,2876.78 5038.99,2876.78 ; 4996.99,2883.78 5038.99,2883.78 ; 4996.99,2946.78 5001.99,2946.78 ; 4996.99,4766.54 5038.99,4766.54 ; 4996.99,4773.54 5038.99,4773.54 ; 4996.99,4836.54 5001.99,4836.54 ; 4997.99,2877.78 5037.99,2877.78 ; 4997.99,2882.78 5037.99,2882.78 ; 4997.99,2947.78 5001.99,2947.78 ; 4997.99,4767.54 5037.99,4767.54 ; 4997.99,4772.54 5037.99,4772.54 ; 4997.99,4837.54 5001.99,4837.54 ; 4998.99,2878.78 5036.99,2878.78 ; 4998.99,2881.78 5036.99,2881.78 ; 4998.99,2948.78 5002.99,2948.78 ; 4998.99,4768.54 5036.99,4768.54 ; 4998.99,4771.54 5036.99,4771.54 ; 4998.99,4838.54 5002.99,4838.54 ; 4999.99,2879.78 5035.99,2879.78 ; 4999.99,2880.78 5035.99,2880.78 ; 4999.99,2949.78 5002.99,2949.78 ; 4999.99,4769.54 5035.99,4769.54 ; 4999.99,4770.54 5035.99,4770.54 ; 4999.99,4839.54 5002.99,4839.54 ; 5000.99,2950.78 5002.99,2950.78 ; 5000.99,4840.54 5002.99,4840.54 ; 5001.99,2951.78 5003.99,2951.78 ; 5001.99,4841.54 5003.99,4841.54 ; 5002.99,2952.78 5003.99,2952.78 ; 5002.99,4842.54 5003.99,4842.54 ; 5018.99,2861.78 5053.99,2861.78 ; 5018.99,2898.78 5053.99,2898.78 ; 5018.99,4751.54 5053.99,4751.54 ; 5018.99,4788.54 5053.99,4788.54 ; 5019.99,2860.78 5054.99,2860.78 ; 5019.99,2899.78 5054.99,2899.78 ; 5019.99,4750.54 5054.99,4750.54 ; 5019.99,4789.54 5054.99,4789.54 ; 5020.99,2859.78 5055.99,2859.78 ; 5020.99,2900.78 5055.99,2900.78 ; 5020.99,4749.54 5055.99,4749.54 ; 5020.99,4790.54 5055.99,4790.54 ; 5021.99,2858.78 5056.99,2858.78 ; 5021.99,2901.78 5056.99,2901.78 ; 5021.99,4748.54 5056.99,4748.54 ; 5021.99,4791.54 5056.99,4791.54 ; 5022.99,2857.78 5057.99,2857.78 ; 5022.99,2902.78 5057.99,2902.78 ; 5022.99,4747.54 5057.99,4747.54 ; 5022.99,4792.54 5057.99,4792.54 ; 5023.99,2856.78 5058.99,2856.78 ; 5023.99,2903.78 5058.99,2903.78 ; 5023.99,4746.54 5058.99,4746.54 ; 5023.99,4793.54 5058.99,4793.54 ; 5024.99,2855.78 5059.99,2855.78 ; 5024.99,2904.78 5059.99,2904.78 ; 5024.99,4745.54 5059.99,4745.54 ; 5024.99,4794.54 5059.99,4794.54 ; 5025.99,2854.78 5060.99,2854.78 ; 5025.99,2905.78 5060.99,2905.78 ; 5025.99,4744.54 5060.99,4744.54 ; 5025.99,4795.54 5060.99,4795.54 ; 5026.99,2853.78 5061.99,2853.78 ; 5026.99,2906.78 5061.99,2906.78 ; 5026.99,4743.54 5061.99,4743.54 ; 5026.99,4796.54 5061.99,4796.54 ; 5027.99,2852.78 5062.99,2852.78 ; 5027.99,2907.78 5077.99,2907.78 ; 5027.99,4742.54 5062.99,4742.54 ; 5027.99,4797.54 5077.99,4797.54 ; 5028.99,2851.78 5063.99,2851.78 ; 5028.99,2908.78 5076.99,2908.78 ; 5028.99,4741.54 5063.99,4741.54 ; 5028.99,4798.54 5076.99,4798.54 ; 5029.99,2850.78 5064.99,2850.78 ; 5029.99,2909.78 5075.99,2909.78 ; 5029.99,4740.54 5064.99,4740.54 ; 5029.99,4799.54 5075.99,4799.54 ; 5030.99,2849.78 5065.99,2849.78 ; 5030.99,2910.78 5074.99,2910.78 ; 5030.99,4739.54 5065.99,4739.54 ; 5030.99,4800.54 5074.99,4800.54 ; 5031.99,2848.78 5066.99,2848.78 ; 5031.99,2911.78 5073.99,2911.78 ; 5031.99,2950.78 5034.99,2950.78 ; 5031.99,2951.78 5033.99,2951.78 ; 5031.99,2952.78 5032.99,2952.78 ; 5031.99,4738.54 5066.99,4738.54 ; 5031.99,4801.54 5073.99,4801.54 ; 5031.99,4840.54 5034.99,4840.54 ; 5031.99,4841.54 5033.99,4841.54 ; 5031.99,4842.54 5032.99,4842.54 ; 5032.99,2847.78 5067.99,2847.78 ; 5032.99,2912.78 5072.99,2912.78 ; 5032.99,2948.78 5036.99,2948.78 ; 5032.99,2949.78 5035.99,2949.78 ; 5032.99,4737.54 5067.99,4737.54 ; 5032.99,4802.54 5072.99,4802.54 ; 5032.99,4838.54 5036.99,4838.54 ; 5032.99,4839.54 5035.99,4839.54 ; 5033.99,2846.78 5068.99,2846.78 ; 5033.99,2913.78 5071.99,2913.78 ; 5033.99,2945.78 5039.99,2945.78 ; 5033.99,2946.78 5038.99,2946.78 ; 5033.99,2947.78 5037.99,2947.78 ; 5033.99,4736.54 5068.99,4736.54 ; 5033.99,4803.54 5071.99,4803.54 ; 5033.99,4835.54 5039.99,4835.54 ; 5033.99,4836.54 5038.99,4836.54 ; 5033.99,4837.54 5037.99,4837.54 ; 5034.99,2845.78 5069.99,2845.78 ; 5034.99,2914.78 5070.99,2914.78 ; 5034.99,2942.78 5042.99,2942.78 ; 5034.99,2943.78 5041.99,2943.78 ; 5034.99,2944.78 5040.99,2944.78 ; 5034.99,4735.54 5069.99,4735.54 ; 5034.99,4804.54 5070.99,4804.54 ; 5034.99,4832.54 5042.99,4832.54 ; 5034.99,4833.54 5041.99,4833.54 ; 5034.99,4834.54 5040.99,4834.54 ; 5035.99,2844.78 5070.99,2844.78 ; 5035.99,2915.78 5069.99,2915.78 ; 5035.99,2939.78 5045.99,2939.78 ; 5035.99,2940.78 5044.99,2940.78 ; 5035.99,2941.78 5043.99,2941.78 ; 5035.99,4734.54 5070.99,4734.54 ; 5035.99,4805.54 5069.99,4805.54 ; 5035.99,4829.54 5045.99,4829.54 ; 5035.99,4830.54 5044.99,4830.54 ; 5035.99,4831.54 5043.99,4831.54 ; 5036.99,2843.78 5071.99,2843.78 ; 5036.99,2916.78 5068.99,2916.78 ; 5036.99,2936.78 5048.99,2936.78 ; 5036.99,2937.78 5047.99,2937.78 ; 5036.99,2938.78 5046.99,2938.78 ; 5036.99,4733.54 5071.99,4733.54 ; 5036.99,4806.54 5068.99,4806.54 ; 5036.99,4826.54 5048.99,4826.54 ; 5036.99,4827.54 5047.99,4827.54 ; 5036.99,4828.54 5046.99,4828.54 ; 5037.99,2842.78 5072.99,2842.78 ; 5037.99,2917.78 5067.99,2917.78 ; 5037.99,2933.78 5051.99,2933.78 ; 5037.99,2934.78 5050.99,2934.78 ; 5037.99,2935.78 5049.99,2935.78 ; 5037.99,4732.54 5072.99,4732.54 ; 5037.99,4807.54 5067.99,4807.54 ; 5037.99,4823.54 5051.99,4823.54 ; 5037.99,4824.54 5050.99,4824.54 ; 5037.99,4825.54 5049.99,4825.54 ; 5038.99,2841.78 5073.99,2841.78 ; 5038.99,2918.78 5066.99,2918.78 ; 5038.99,2930.78 5054.99,2930.78 ; 5038.99,2931.78 5053.99,2931.78 ; 5038.99,2932.78 5052.99,2932.78 ; 5038.99,4731.54 5073.99,4731.54 ; 5038.99,4808.54 5066.99,4808.54 ; 5038.99,4820.54 5054.99,4820.54 ; 5038.99,4821.54 5053.99,4821.54 ; 5038.99,4822.54 5052.99,4822.54 ; 5039.99,2840.78 5074.99,2840.78 ; 5039.99,2919.78 5066.99,2919.78 ; 5039.99,2929.78 5055.99,2929.78 ; 5039.99,4730.54 5074.99,4730.54 ; 5039.99,4809.54 5066.99,4809.54 ; 5039.99,4819.54 5055.99,4819.54 ; 5040.99,2839.78 5075.99,2839.78 ; 5040.99,2920.78 5067.99,2920.78 ; 5040.99,2928.78 5075.99,2928.78 ; 5040.99,4729.54 5075.99,4729.54 ; 5040.99,4810.54 5067.99,4810.54 ; 5040.99,4818.54 5075.99,4818.54 ; 5041.99,2838.78 5076.99,2838.78 ; 5041.99,2921.78 5068.99,2921.78 ; 5041.99,2927.78 5074.99,2927.78 ; 5041.99,4728.54 5076.99,4728.54 ; 5041.99,4811.54 5068.99,4811.54 ; 5041.99,4817.54 5074.99,4817.54 ; 5042.99,2837.78 5077.99,2837.78 ; 5042.99,2922.78 5069.99,2922.78 ; 5042.99,2926.78 5073.99,2926.78 ; 5042.99,4727.54 5077.99,4727.54 ; 5042.99,4812.54 5069.99,4812.54 ; 5042.99,4816.54 5073.99,4816.54 ; 5043.99,2836.78 5078.99,2836.78 ; 5043.99,2923.78 5070.99,2923.78 ; 5043.99,2925.78 5072.99,2925.78 ; 5043.99,4726.54 5078.99,4726.54 ; 5043.99,4813.54 5070.99,4813.54 ; 5043.99,4815.54 5072.99,4815.54 ; 5044.99,2835.78 5079.99,2835.78 ; 5044.99,2924.78 5071.99,2924.78 ; 5044.99,4725.54 5079.99,4725.54 ; 5044.99,4814.54 5071.99,4814.54 ; 5045.99,2834.78 5080.99,2834.78 ; 5045.99,4724.54 5080.99,4724.54 ; 5046.99,2833.78 5081.99,2833.78 ; 5046.99,4723.54 5081.99,4723.54 ; 5047.99,2832.78 5082.99,2832.78 ; 5047.99,4722.54 5082.99,4722.54 ; 5048.99,2831.78 5083.99,2831.78 ; 5048.99,4721.54 5083.99,4721.54 ; 5049.99,2830.78 5084.99,2830.78 ; 5049.99,4720.54 5084.99,4720.54 ; 5050.99,2829.78 5085.99,2829.78 ; 5050.99,4719.54 5085.99,4719.54 ; 5051.99,2828.78 5086.99,2828.78 ; 5051.99,4718.54 5086.99,4718.54 ; 5052.99,2827.78 5087.99,2827.78 ; 5052.99,4717.54 5087.99,4717.54 ; 5053.99,2826.78 5088.99,2826.78 ; 5053.99,4716.54 5088.99,4716.54 ; 5054.99,2825.78 5089.99,2825.78 ; 5054.99,4715.54 5089.99,4715.54 ; 5055.99,2824.78 5090.99,2824.78 ; 5055.99,4714.54 5090.99,4714.54 ; 5056.99,2823.78 5091.99,2823.78 ; 5056.99,4713.54 5091.99,4713.54 ; 5057.99,2822.78 5092.99,2822.78 ; 5057.99,2929.78 5076.99,2929.78 ; 5057.99,4712.54 5092.99,4712.54 ; 5057.99,4819.54 5076.99,4819.54 ; 5058.99,2821.78 5093.99,2821.78 ; 5058.99,2930.78 5077.99,2930.78 ; 5058.99,4711.54 5093.99,4711.54 ; 5058.99,4820.54 5077.99,4820.54 ; 5059.99,2820.78 5094.99,2820.78 ; 5059.99,2931.78 5078.99,2931.78 ; 5059.99,4710.54 5094.99,4710.54 ; 5059.99,4821.54 5078.99,4821.54 ; 5060.99,2819.78 5094.99,2819.78 ; 5060.99,2932.78 5079.99,2932.78 ; 5060.99,4709.54 5094.99,4709.54 ; 5060.99,4822.54 5079.99,4822.54 ; 5061.99,2818.78 5094.99,2818.78 ; 5061.99,2933.78 5080.99,2933.78 ; 5061.99,4708.54 5094.99,4708.54 ; 5061.99,4823.54 5080.99,4823.54 ; 5062.99,2817.78 5094.99,2817.78 ; 5062.99,2906.78 5078.99,2906.78 ; 5062.99,2934.78 5081.99,2934.78 ; 5062.99,4707.54 5094.99,4707.54 ; 5062.99,4796.54 5078.99,4796.54 ; 5062.99,4824.54 5081.99,4824.54 ; 5063.99,2816.78 5094.99,2816.78 ; 5063.99,2905.78 5079.99,2905.78 ; 5063.99,2935.78 5082.99,2935.78 ; 5063.99,4706.54 5094.99,4706.54 ; 5063.99,4795.54 5079.99,4795.54 ; 5063.99,4825.54 5082.99,4825.54 ; 5064.99,2815.78 5095.99,2815.78 ; 5064.99,2904.78 5080.99,2904.78 ; 5064.99,2936.78 5083.99,2936.78 ; 5064.99,4705.54 5095.99,4705.54 ; 5064.99,4794.54 5080.99,4794.54 ; 5064.99,4826.54 5083.99,4826.54 ; 5065.99,2814.78 5095.99,2814.78 ; 5065.99,2903.78 5081.99,2903.78 ; 5065.99,2937.78 5084.99,2937.78 ; 5065.99,4704.54 5095.99,4704.54 ; 5065.99,4793.54 5081.99,4793.54 ; 5065.99,4827.54 5084.99,4827.54 ; 5066.99,2813.78 5095.99,2813.78 ; 5066.99,2902.78 5082.99,2902.78 ; 5066.99,2938.78 5085.99,2938.78 ; 5066.99,4703.54 5095.99,4703.54 ; 5066.99,4792.54 5082.99,4792.54 ; 5066.99,4828.54 5085.99,4828.54 ; 5067.99,2812.78 5095.99,2812.78 ; 5067.99,2939.78 5086.99,2939.78 ; 5067.99,4702.54 5095.99,4702.54 ; 5067.99,4829.54 5086.99,4829.54 ; 5068.99,2811.78 5095.99,2811.78 ; 5068.99,2901.78 5083.99,2901.78 ; 5068.99,2940.78 5087.99,2940.78 ; 5068.99,4701.54 5095.99,4701.54 ; 5068.99,4791.54 5083.99,4791.54 ; 5068.99,4830.54 5087.99,4830.54 ; 5069.99,2810.78 5095.99,2810.78 ; 5069.99,2941.78 5088.99,2941.78 ; 5069.99,4700.54 5095.99,4700.54 ; 5069.99,4831.54 5088.99,4831.54 ; 5070.99,2809.78 5096.99,2809.78 ; 5070.99,2900.78 5084.99,2900.78 ; 5070.99,2942.78 5089.99,2942.78 ; 5070.99,4699.54 5096.99,4699.54 ; 5070.99,4790.54 5084.99,4790.54 ; 5070.99,4832.54 5089.99,4832.54 ; 5071.99,2808.78 5096.99,2808.78 ; 5071.99,2943.78 5093.99,2943.78 ; 5071.99,4698.54 5096.99,4698.54 ; 5071.99,4833.54 5093.99,4833.54 ; 5072.99,2807.78 5096.99,2807.78 ; 5072.99,2944.78 5095.99,2944.78 ; 5072.99,4697.54 5096.99,4697.54 ; 5072.99,4834.54 5095.99,4834.54 ; 5073.99,2806.78 5096.99,2806.78 ; 5073.99,2899.78 5085.99,2899.78 ; 5073.99,2945.78 5096.99,2945.78 ; 5073.99,4696.54 5096.99,4696.54 ; 5073.99,4789.54 5085.99,4789.54 ; 5073.99,4835.54 5096.99,4835.54 ; 5074.99,2805.78 5096.99,2805.78 ; 5074.99,2946.78 5097.99,2946.78 ; 5074.99,4695.54 5096.99,4695.54 ; 5074.99,4836.54 5097.99,4836.54 ; 5075.99,2804.78 5096.99,2804.78 ; 5075.99,2947.78 5098.99,2947.78 ; 5075.99,4694.54 5096.99,4694.54 ; 5075.99,4837.54 5098.99,4837.54 ; 5076.99,2803.78 5097.99,2803.78 ; 5076.99,2898.78 5086.99,2898.78 ; 5076.99,2948.78 5099.99,2948.78 ; 5076.99,4693.54 5097.99,4693.54 ; 5076.99,4788.54 5086.99,4788.54 ; 5076.99,4838.54 5099.99,4838.54 ; 5077.99,2949.78 5099.99,2949.78 ; 5077.99,4839.54 5099.99,4839.54 ; 5078.99,2950.78 5100.99,2950.78 ; 5078.99,4840.54 5100.99,4840.54 ; 5079.99,2897.78 5087.99,2897.78 ; 5079.99,2951.78 5100.99,2951.78 ; 5079.99,4787.54 5087.99,4787.54 ; 5079.99,4841.54 5100.99,4841.54 ; 5080.99,2952.78 5100.99,2952.78 ; 5080.99,2953.78 5100.99,2953.78 ; 5080.99,2954.78 5100.99,2954.78 ; 5080.99,2955.78 5100.99,2955.78 ; 5080.99,2956.78 5099.99,2956.78 ; 5080.99,4842.54 5100.99,4842.54 ; 5080.99,4843.54 5100.99,4843.54 ; 5080.99,4844.54 5100.99,4844.54 ; 5080.99,4845.54 5100.99,4845.54 ; 5080.99,4846.54 5099.99,4846.54 ; 5081.99,2802.78 5097.99,2802.78 ; 5081.99,2957.78 5099.99,2957.78 ; 5081.99,2958.78 5098.99,2958.78 ; 5081.99,4692.54 5097.99,4692.54 ; 5081.99,4847.54 5099.99,4847.54 ; 5081.99,4848.54 5098.99,4848.54 ; 5082.99,2896.78 5088.99,2896.78 ; 5082.99,2959.78 5098.99,2959.78 ; 5082.99,4786.54 5088.99,4786.54 ; 5082.99,4849.54 5098.99,4849.54 ; 5083.99,2960.78 5097.99,2960.78 ; 5083.99,4850.54 5097.99,4850.54 ; 5084.99,2961.78 5095.99,2961.78 ; 5084.99,4851.54 5095.99,4851.54 ; 5085.99,2895.78 5089.99,2895.78 ; 5085.99,4785.54 5089.99,4785.54 ; 5086.99,2962.78 5093.99,2962.78 ; 5086.99,4852.54 5093.99,4852.54 ; 5087.99,2801.78 5097.99,2801.78 ; 5087.99,4691.54 5097.99,4691.54 ; 5088.99,2894.78 5089.99,2894.78 ; 5088.99,4784.54 5089.99,4784.54 ; 5089.99,2783.78 5098.99,2783.78 ; 5089.99,4673.54 5098.99,4673.54 ; 5090.99,2976.78 5099.99,2976.78 ; 5090.99,4866.54 5099.99,4866.54 ; 5093.99,2784.78 5100.99,2784.78 ; 5093.99,2800.78 5097.99,2800.78 ; 5093.99,2975.78 5100.99,2975.78 ; 5093.99,4674.54 5100.99,4674.54 ; 5093.99,4690.54 5097.99,4690.54 ; 5093.99,4865.54 5100.99,4865.54 ; 5095.99,2785.78 5102.99,2785.78 ; 5095.99,4675.54 5102.99,4675.54 ; 5096.99,2974.78 5102.99,2974.78 ; 5096.99,4864.54 5102.99,4864.54 ; 5097.99,2786.78 5103.99,2786.78 ; 5097.99,4676.54 5103.99,4676.54 ; 5098.99,2973.78 5103.99,2973.78 ; 5098.99,4863.54 5103.99,4863.54 ; 5099.99,2787.78 5104.99,2787.78 ; 5099.99,2972.78 5105.99,2972.78 ; 5099.99,4677.54 5104.99,4677.54 ; 5099.99,4862.54 5105.99,4862.54 ; 5101.99,2788.78 5105.99,2788.78 ; 5101.99,2971.78 5106.99,2971.78 ; 5101.99,4678.54 5105.99,4678.54 ; 5101.99,4861.54 5106.99,4861.54 ; 5102.99,2789.78 5107.99,2789.78 ; 5102.99,2970.78 5107.99,2970.78 ; 5102.99,4679.54 5107.99,4679.54 ; 5102.99,4860.54 5107.99,4860.54 ; 5103.99,2790.78 5108.99,2790.78 ; 5103.99,2969.78 5108.99,2969.78 ; 5103.99,4680.54 5108.99,4680.54 ; 5103.99,4859.54 5108.99,4859.54 ; 5104.99,2791.78 5108.99,2791.78 ; 5104.99,4681.54 5108.99,4681.54 ; 5105.99,2792.78 5109.99,2792.78 ; 5105.99,2968.78 5109.99,2968.78 ; 5105.99,4682.54 5109.99,4682.54 ; 5105.99,4858.54 5109.99,4858.54 ; 5106.99,2793.78 5110.99,2793.78 ; 5106.99,2966.78 5110.99,2966.78 ; 5106.99,2967.78 5110.99,2967.78 ; 5106.99,4683.54 5110.99,4683.54 ; 5106.99,4856.54 5110.99,4856.54 ; 5106.99,4857.54 5110.99,4857.54 ; 5107.99,2794.78 5111.99,2794.78 ; 5107.99,2965.78 5111.99,2965.78 ; 5107.99,4684.54 5111.99,4684.54 ; 5107.99,4855.54 5111.99,4855.54 ; 5108.99,2795.78 5112.99,2795.78 ; 5108.99,2964.78 5112.99,2964.78 ; 5108.99,4685.54 5112.99,4685.54 ; 5108.99,4854.54 5112.99,4854.54 ; 5109.99,2796.78 5112.99,2796.78 ; 5109.99,2797.78 5113.99,2797.78 ; 5109.99,2962.78 5113.99,2962.78 ; 5109.99,2963.78 5112.99,2963.78 ; 5109.99,4686.54 5112.99,4686.54 ; 5109.99,4687.54 5113.99,4687.54 ; 5109.99,4852.54 5113.99,4852.54 ; 5109.99,4853.54 5112.99,4853.54 ; 5110.99,2798.78 5113.99,2798.78 ; 5110.99,2799.78 5114.99,2799.78 ; 5110.99,2961.78 5113.99,2961.78 ; 5110.99,4688.54 5113.99,4688.54 ; 5110.99,4689.54 5114.99,4689.54 ; 5110.99,4851.54 5113.99,4851.54 ; 5111.99,2800.78 5114.99,2800.78 ; 5111.99,2801.78 5115.99,2801.78 ; 5111.99,2958.78 5115.99,2958.78 ; 5111.99,2959.78 5114.99,2959.78 ; 5111.99,2960.78 5114.99,2960.78 ; 5111.99,4690.54 5114.99,4690.54 ; 5111.99,4691.54 5115.99,4691.54